# EAGLE board OSO-PYCO-A1-02 (EAGLE 9.6.2)
REV: A
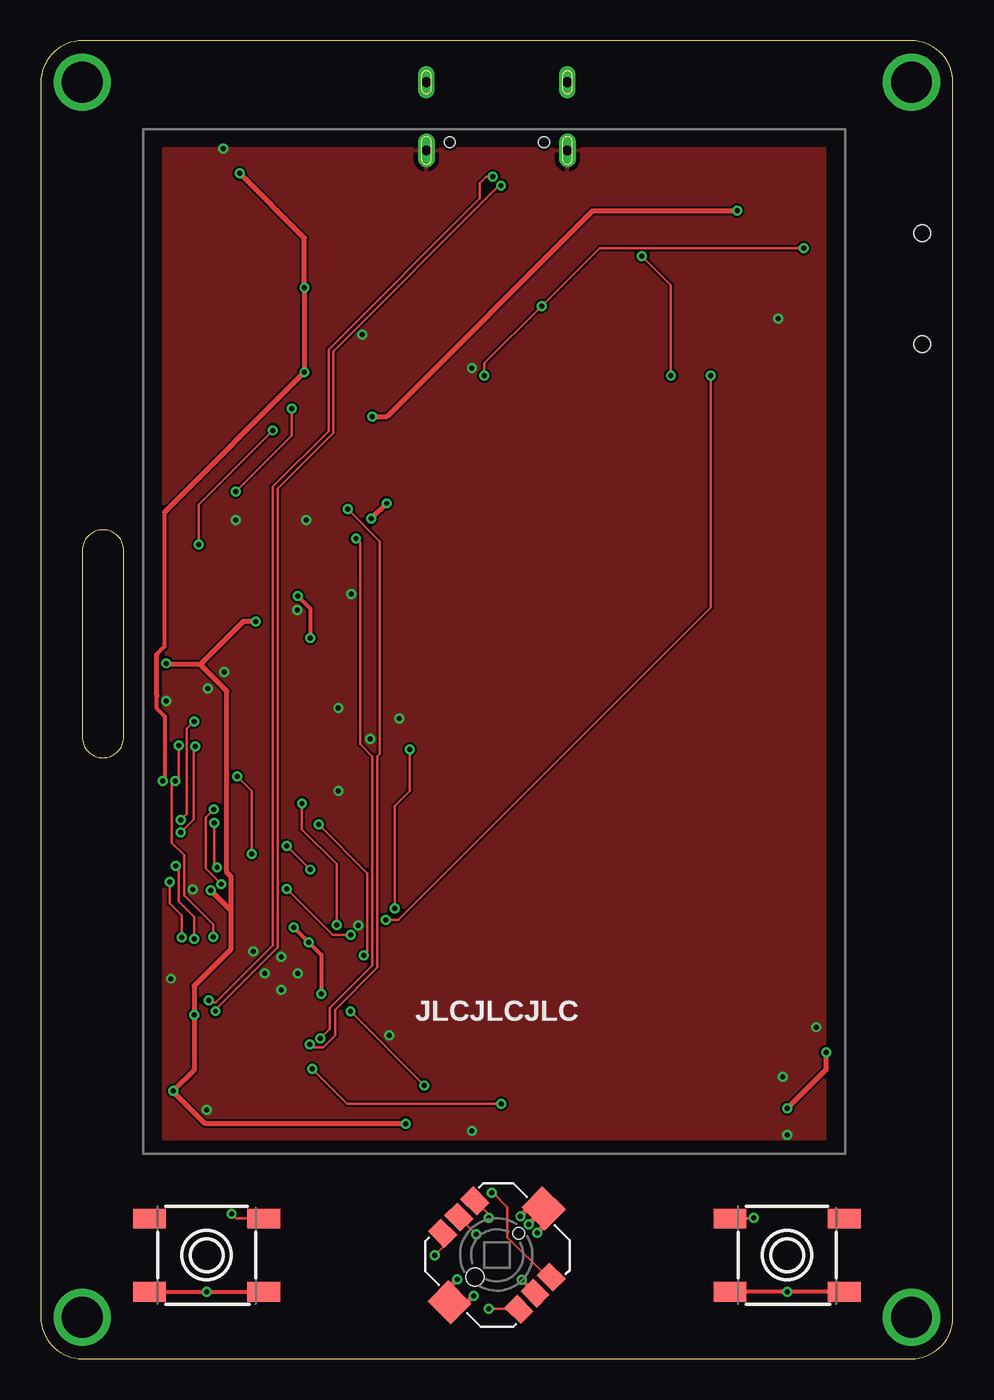
[diagram p0: board, top side]
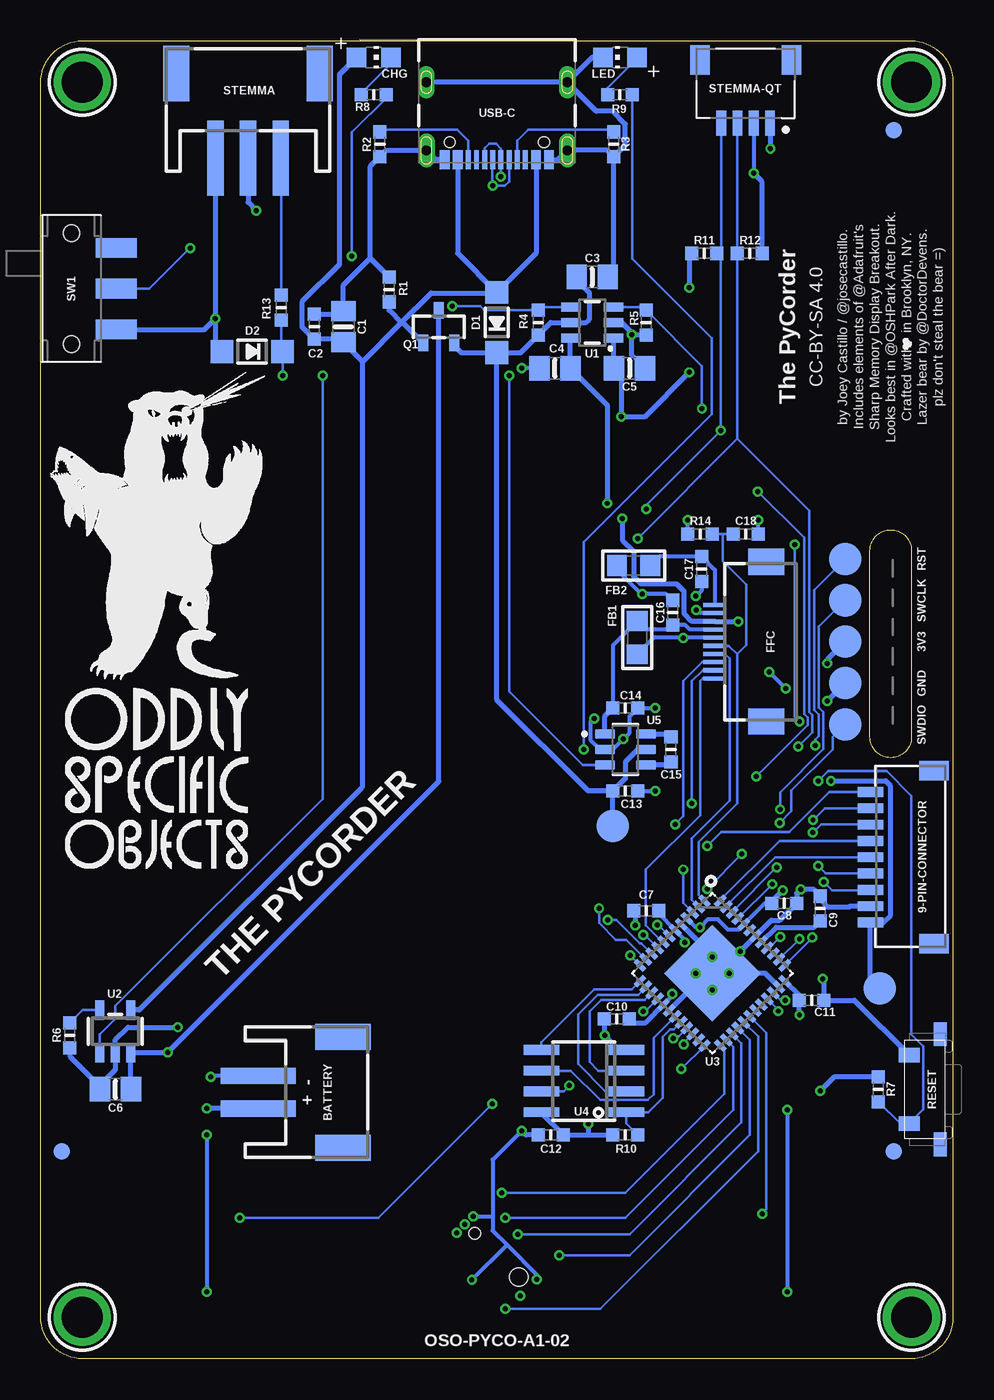
[diagram p1: board, bottom side, seen from below]

Size 55.88 x 80.77 mm. Coordinates in mm from the lower left corner, seen from the top.
Outline: 2.54,0 53.34,0 arc90 55.88,2.54 55.88,78.23 arc90 53.34,80.77 2.54,80.77 arc90 0,78.23 0,2.54 arc90 2.54,0
Outline: 5.08,49.53 arc90 3.81,50.8 arc90 2.54,49.53 2.54,38.1 arc90 3.81,36.83 arc90 5.08,38.1 5.08,49.53
Copper layers (1*16): Top 0.035559375mm / dielectric 1.6mm / Bottom 0.035559375mm
Design rules "jlcpcb2layer *": minimum track width 5mil, minimum drill 12mil, track to track 5mil, track to pad 5mil, pad to pad 5mil, via to via 5mil, smd to smd 5mil, copper to edge 8mil, drill to drill 6mil, minimum pad ring 6mil, minimum via ring 6mil, stop-mask expansion 2.5mil, vias tented up to drill 12mil, thermal gap 10mil
Net classes: 1 power: width 0.254 mm, drill 0.254 mm; 2 gnd: width 0.254 mm, drill 0.254 mm
bKeepout: area 24,22.5 to 54.5,59.5; area 26.2,25.3 to 51.2,57.8; area 26.6,23.6 to 50.6,58.6; area 28.1,22.9 to 48.1,58.9; area 29.9,33.7 to 55.3,60.4; area 24,22 to 54.5,33.4

## Footprints (pad centres in the part's own frame; a part is rotated, then mirrored left to right if it is on the bottom)
JST_SH9 = smd 0.6 x 1.55: 1 -4,2.514; 2 -3,2.514; 3 -2,2.514; 4 -1,2.514; 5 0,2.514; 6 1,2.514; 7 2,2.514; 8 3,2.514; 9 4,2.514 | smd 1.2 x 1.8: MT1 -5.3,-1.386; MT2 5.3,-1.386
6MMX6MM_TACTILE_SMT = smd 2 x 1.2: A -3.5,-2.25; A' 3.5,-2.25; B -3.5,2.25; B' 3.5,2.25
K1-5202UA = smd 1.4 x 1.1: P$1 -3.3,1.4; P$2 -3.3,0; P$3 -3.3,-1.4; P$4 3.3,1.4; P$5 3.3,0; P$6 3.3,-1.4 | smd 2 x 1.8: P$7 0,-4.1; P$8 0,4.05 | hole 1.1: 0,-1.9 | hole 0.7: 0,1.9
JSTPH2 = smd 1 x 4.6: 1 -1,-3.7; 2 1,-3.7 | smd 1.6 x 3.4: NC1 -3.4,1.5; NC2 3.4,1.5
0805-NO = smd 1.24 x 1.5: 1 -0.95,0; 2 0.95,0
_0603MP = smd 0.8 x 0.8: 1 -0.762,0; 2 0.762,0
CHIP-LED0805 = smd 1.2 x 1.2: A 0,-1.05; C 0,1.05
SOD-123 = smd 1.4 x 1.4: A 1.85,0; C -1.85,0
_0805 = smd 1.2 x 1.3: 1 -1.016,0; 2 1.016,0
SHARP_2.7IN = smd 0.25 x 1.4: P$1 -2.25,2.9; P$2 -1.75,2.9; P$3 -1.25,2.9; P$4 -0.75,2.9; P$5 -0.25,2.9; P$6 0.25,2.9; P$7 0.75,2.9; P$8 1.25,2.9; P$9 1.75,2.9; P$10 2.25,2.9 | smd 1.6 x 2.2: SUPPORT1 -4.9,-0.25; SUPPORT2 4.9,-0.25
FIDUCIAL_1MM = smd 1 x 1: 1 0,0
SOT23-R = smd 0.635 x 1.016: 1 -0.95,-1; 2 0.95,-1; 3 0,1
TL3330A = smd 0.9 x 1.27: P$1 -2.1,0.89; P$2 2.1,0.89 | smd 1.45 x 0.8: P$3 -3.375,-1; P$4 3.375,-1
JSTPH3 = smd 1 x 4.6: 1 -2,-2.7; 2 0,-2.7; 3 2,-2.7 | smd 1.6 x 3.4: NC1 -4.4,2.5; NC2 4.4,2.5
JST_SM04B-SRSS-TB(LF)(SN) = smd 0.6 x 1.55: 1 -1.5,0; 2 -0.5,0; 3 0.5,0; 4 1.5,0 | smd 1.2 x 1.8: S1 -2.8,-3.875; S2 2.8,-3.875
SW_JS102011SAQN = smd 1.2 x 2.5: 1 -2.5,2.75; 2 0,2.75; 3 2.5,2.75 | hole 1: -3.4,0; 3.4,0
TESTPOINT_ROUND_2MM_NO = smd 2 x 2: P$1 0,0
SOT23-6 = smd 0.55 x 1.2: 1 0.95,1.3; 2 0,1.3; 3 -0.95,1.3; 4 -0.95,-1.3; 5 0,-1.3; 6 0.95,-1.3
SOT23-5 = smd 0.55 x 1.2: 1 -0.95,-1.3; 2 0,-1.3; 3 0.95,-1.3; 4 0.95,1.3; 5 -0.95,1.3
QFN48_7X7MC = smd 0.813 x 0.305: 1 -3.48,2.794; 2 -3.48,2.286; 3 -3.48,1.778; 4 -3.48,1.27; 5 -3.48,0.762; 6 -3.48,0.254; 7 -3.48,-0.254; 8 -3.48,-0.762; 9 -3.48,-1.27; 10 -3.48,-1.778; 11 -3.48,-2.286; 12 -3.48,-2.794; 25 3.48,-2.794; 26 3.48,-2.286; 27 3.48,-1.778; 28 3.48,-1.27; 29 3.48,-0.762; 30 3.48,-0.254; 31 3.48,0.254; 32 3.48,0.762; 33 3.48,1.27; 34 3.48,1.778; 35 3.48,2.286; 36 3.48,2.794 | smd 0.305 x 0.813: 13 -2.794,-3.48; 14 -2.286,-3.48; 15 -1.778,-3.48; 16 -1.27,-3.48; 17 -0.762,-3.48; 18 -0.254,-3.48; 19 0.254,-3.48; 20 0.762,-3.48; 21 1.27,-3.48; 22 1.778,-3.48; 23 2.286,-3.48; 24 2.794,-3.48; 37 2.794,3.48; 38 2.286,3.48; 39 1.778,3.48; 40 1.27,3.48; 41 0.762,3.48; 42 0.254,3.48; 43 -0.254,3.48; 44 -0.762,3.48; 45 -1.27,3.48; 46 -1.778,3.48; 47 -2.286,3.48; 48 -2.794,3.48 | smd 4.191 x 4.191: 49 0,0
SOIC8_150MIL = smd 0.6 x 2.2: 1 -1.905,-2.6; 2 -0.635,-2.6; 3 0.635,-2.6; 4 1.905,-2.6; 5 1.905,2.6; 6 0.635,2.6; 7 -0.635,2.6; 8 -1.905,2.6
SOT95P280X145-6N = smd 1.21 x 0.58: 1 -1.255,0.95; 2 -1.255,0; 3 -1.255,-0.95; 4 1.255,-0.95; 5 1.255,0; 6 1.255,0.95
MOUNTINGHOLE_2.5_PLATED = drill 2.5 pad 3.2: P$1 0,0
GCT_USB4105-GF-A = smd 0.6 x 1.15: A1/B12 -3.2,4.755; A4/B9 -2.4,4.755; B1/A12 3.2,4.755; B4/A9 2.4,4.755 | smd 0.3 x 1.15: A5 -1.25,4.755; A6 -0.25,4.755; A7 0.25,4.755; A8 1.25,4.755; B5 1.75,4.755; B6 0.75,4.755; B7 -0.75,4.755; B8 -1.75,4.755 | drill 0.6 pad 1 long: G1 -4.32,0; G2 4.32,0 | drill 0.6 pad 1.05 long: G3 -4.32,4.18; G4 4.32,4.18 | hole 0.65: 2.89,3.68; -2.89,3.68

## Placement (x,y rotation side)
9-PIN-CONNECTOR  [JST_SH9]  2.54,30.73 90 bottom
B1  EVQQ  [6MMX6MM_TACTILE_SMT]  10.16,6.35 0 top
B2  EVQQ  [6MMX6MM_TACTILE_SMT]  45.72,6.35 0 top
B3  K1-5202UA  [K1-5202UA]  27.94,6.35 315 top
BATTERY  JSTPH  [JSTPH2]  38.86,16.33 270 bottom
C1  10uF  [0805-NO]  37.34,63.25 90 bottom
C2  0.1uF  [_0603MP]  39.12,63.25 90 bottom
C3  10uF  [0805-NO]  22.1,66.29 0 bottom
C4  10uF  [0805-NO]  24.38,60.71 180 bottom
C5  10uF  [0805-NO]  19.81,60.71 0 bottom
C6  10uF  [0805-NO]  51.31,16.51 180 bottom
C7  1uF  [_0603MP]  18.8,27.46 0 bottom
C8  1uF  [_0603MP]  10.34,27.91 180 bottom
C9  1uF  [_0603MP]  8.13,27.58 270 bottom
C10  1uF  [_0603MP]  20.6,20.83 0 bottom
C11  1uF  [_0603MP]  8.66,21.97 180 bottom
C12  1uF  [_0603MP]  24.64,13.72 0 bottom
C13  2.2uF  [_0603MP]  20.07,34.8 0 bottom
C14  2.2uF  [_0603MP]  20.07,39.88 0 bottom
C15  .22uF  [_0603MP]  17.27,37.34 270 bottom
C16  1uF  [_0603MP]  17.17,45.72 90 bottom
C17  1uF  [_0603MP]  15.4,48.39 90 bottom
C18  0.1uF  [_0603MP]  12.7,50.55 0 bottom
CHG  AMBER  [CHIP-LED0805]  35.48,79.76 270 bottom
D1  MBR120  [SOD-123]  27.94,63.5 90 bottom
D2  3.6V  [SOD-123]  42.93,61.72 180 bottom
FB1  FERRITE  [_0805]  19.33,44.2 270 bottom
FB2  FERRITE  [_0805]  19.56,48.61 0 bottom
FFC  LS027B7DH01  [SHARP_2.7IN]  11.68,43.94 90 bottom
FID1  FIDUCIAL_1MM  [FIDUCIAL_1MM]  3.63,12.7 0 bottom
FID2  FIDUCIAL_1MM  [FIDUCIAL_1MM]  54.61,12.7 0 bottom
FID3  FIDUCIAL_1MM  [FIDUCIAL_1MM]  3.63,75.29 0 bottom
LED  RED  [CHIP-LED0805]  20.4,79.76 90 bottom
Q1  DMG341  [SOT23-R]  31.5,63.25 0 bottom
R1  100K  [_0603MP]  34.54,65.53 90 bottom
R2  5.1K  [_0603MP]  35.1,74.42 270 bottom
R3  5.1K  [_0603MP]  20.78,74.42 270 bottom
R4  100K  [_0603MP]  25.4,63.5 90 bottom
R5  100K  [_0603MP]  18.8,63.5 270 bottom
R6  10K  [_0603MP]  54.1,19.81 270 bottom
R7  10K  [_0603MP]  4.57,16.51 270 bottom
R8  1K  [_0603MP]  35.48,77.47 0 bottom
R9  1K  [_0603MP]  20.4,77.47 180 bottom
R10  10K  [_0603MP]  20.07,13.72 180 bottom
R11  10K  [_0603MP]  15.24,67.74 180 bottom
R12  10K  [_0603MP]  12.45,67.74 0 bottom
R13  1K  [_0603MP]  41.15,64.41 270 bottom
R14  10K  [_0603MP]  15.49,50.55 180 bottom
RESET  [TL3330A]  1.78,16.51 90 bottom
STEMMA  JST PH 3  [JSTPH3]  43.18,76.28 0 bottom
STEMMA-QT  SM04B-SRSS-TB(LF)(SN)  [JST_SM04B-SRSS-TB(LF)(SN)]  12.7,75.72 180 bottom
SW1  JS102011SAQN  [SW_JS102011SAQN]  54,65.58 270 bottom
TP1  [TESTPOINT_ROUND_2MM_NO]  6.6,41.4 90 bottom
TP2  [TESTPOINT_ROUND_2MM_NO]  6.6,43.94 90 bottom
TP3  [TESTPOINT_ROUND_2MM_NO]  6.6,46.48 90 bottom
TP4  [TESTPOINT_ROUND_2MM_NO]  20.83,32.66 0 bottom
TP5  [TESTPOINT_ROUND_2MM_NO]  4.47,22.71 0 bottom
TP6  [TESTPOINT_ROUND_2MM_NO]  6.6,38.86 90 bottom
TP8  [TESTPOINT_ROUND_2MM_NO]  6.6,49.02 90 bottom
U1  AP7332-3333W6-7SOT23  [SOT23-6]  22.1,63.5 270 bottom
U2  MCP73831T-2ACI/OT  [SOT23-5]  51.31,20.07 0 bottom
U3  ATSAMD51G18A-MUT  [QFN48_7X7MC]  14.73,23.62 315 bottom
U4  2MB Flash  [SOIC8_150MIL]  22.61,17.02 90 bottom
U5  REG710NA-5/3K  [SOT95P280X145-6N]  20.07,37.34 0 bottom
U$9  MOUNTINGHOLE2.5  [MOUNTINGHOLE_2.5_PLATED]  2.54,78.23 180 bottom
U$10  MOUNTINGHOLE2.5  [MOUNTINGHOLE_2.5_PLATED]  53.34,78.23 180 bottom
U$16  [OSO_WORDMARK_THREELINE_450MIL_1000DPI]  48.77,35.56 0 bottom
U$27  MOUNTINGHOLE2.5  [MOUNTINGHOLE_2.5_PLATED]  53.34,2.54 90 bottom
U$28  MOUNTINGHOLE2.5  [MOUNTINGHOLE_2.5_PLATED]  2.54,2.54 270 bottom
U$67  [OSO_BEAR_525X750MIL_1000DPI]  48.77,51.05 0 bottom
USB-C  USB4105-GF-A  [GCT_USB4105-GF-A]  27.94,78.23 180 bottom

## Library data of the parts
9-PIN-CONNECTOR B1 B2 BATTERY C1 C2 C6-C12 C16-C18 D1 D2 FB1 FB2 Q1 R1-R14 STEMMA TP1-TP6 TP8 U2 U4 = microbuilder
B3 = K1-5202UA
C3 C5 = microbuilder; CHECKED: KTOWN; COMPANY: ADAFRUIT INDUSTRIES; DRAWN: KTOWN; REV: A
C4 C13-C15 = microbuilder; REV: A
CHG LED = adafruit
FFC = adafruit_display
FID1 FID2 = microbuilder; BOM: EXCLUDE
FID3 U$27 U$28 = microbuilder; BOM: EXCLUDE; CHECKED: KTOWN; COMPANY: ADAFRUIT INDUSTRIES; DRAWN: KTOWN; REV: A
RESET = oddlyspecific
STEMMA-QT = SM04B-SRSS-TB_LF__SN_; DESCRIPTION: SH Series 1.0 mm Pitch 2 Position Single Row Side Entry Shrouded Header; DIGI-KEY_PART_NUMBER: 455-1804-1-ND; DIGI-KEY_PURCHASE_URL: https://www.digikey.com/product-detail/en/jst-sales-america-inc/SM04B-SRSS-TB_LF__SN_/455-1804-1-ND/926875?utm_source=snapeda&utm_medium=aggregator&utm_campaign=symbol; MF: JST Sales; MP: SM04B-SRSS-TB_LF__SN_; PACKAGE: None
SW1 = JS102011SAQN; DESCRIPTION: Slide Switch SPDT Surface Mount, Right Angle; DIGI-KEY_PART_NUMBER: 401-1999-1-ND; DIGI-KEY_PURCHASE_URL: https://www.digikey.com/product-detail/en/c-k/JS102011SAQN/401-1999-1-ND/1640114?utm_source=snapeda&utm_medium=aggregator&utm_campaign=symbol; MF: C&K; MP: JS102011SAQN; PACKAGE: None
U1 U$16 U$67 = My Stuff
U3 = ATSAMD51G18AMUT; BUILT_BY: EMA_Molly; COPYRIGHT: Copyright (C) 2018 Accelerated Designs. All rights reserved; MANUFACTURER_PART_NUMBER: ATSAMD51G18A-MUT; VENDOR: Microchip
U5 = REG710NA-5_3K; DESCRIPTION: 30-mA Switched-Cap DC-DC Converter with fixed 5-V Output 6-SOT-23 -40 to 85; DIGI-KEY_PART_NUMBER: 296-26327-1-ND; MF: Texas Instruments; MP: REG710NA-5/3K; PACKAGE: SOT-23-6 Texas Instruments; PURCHASE-URL: https://pricing.snapeda.com/search/part/REG710NA-5/3K/?ref=eda
U$9 U$10 = microbuilder; BOM: EXCLUDE; REV: A
USB-C = USB4105-GF-A; DESCRIPTION: USB-C (USB TYPE-C) USB 2.0 Receptacle Connector 24 (16+8 Dummy) Position Surface Mount, Right Angle; Through Hole; MF: GCT; MP: USB4105-GF-A; PACKAGE: None; PURCHASE-URL: https://pricing.snapeda.com/search/part/USB4105-GF-A/?ref=eda

## Nets
3.3V [power]: C4.1 C7.2 C8.2 C10.2 C11.2 C12.2 FFC.P$8 R7.1 R10.2 TP2.P$1 U1.6 U3.4 U3.6 U3.17 U3.36 U3.44 U4.8
5.0V [power]: C14.1 C16.1 FB1.1 FFC.P$7 U5.1
!RESET: R7.2 RESET.P$1 TP8.P$1 U3.40
+3V3 [power]: 9-PIN-CONNECTOR.1 C5.1 R11.2 R12.2 STEMMA-QT.2 STEMMA.2 TP5.P$1 U1.1
A0: 9-PIN-CONNECTOR.9 U3.3
A1/SCK: 9-PIN-CONNECTOR.6 U3.48
A2/MOSI: 9-PIN-CONNECTOR.5 U3.47
AGND [gnd]: C17.2 FB2.2 FFC.P$10
AVDD [power]: C17.1 FB1.2 FFC.P$6
CC1: R3.1 USB-C.A5
CC2: R2.1 USB-C.B5
CENTER: B3.P$2 U3.27
D0/CS: 9-PIN-CONNECTOR.4 U3.38
D1/MISO: 9-PIN-CONNECTOR.3 U3.37
DISP: C18.1 FFC.P$5 R14.1 U3.1
DISPLAY_CS: FFC.P$3 U3.12
DISPLAY_MOSI: FFC.P$2 U3.7
DISPLAY_SCK: FFC.P$1 U3.8
EN: R4.2 SW1.2 U1.4 U5.3
EN2: R5.1 U1.3 U3.9
EXTCOMIN: FFC.P$4 U3.2
GND [gnd]: 9-PIN-CONNECTOR.2 B1.A B1.A' B2.A B2.A' B3.P$5 B3.P$7 B3.P$8 BATTERY.1 C1.2 C2.2 C3.2 C4.2 C5.2 C6.2 C7.1 C8.1 C9.1 C10.1 C11.1 C12.1 C13.2 C14.2 C16.2 C18.2 D2.A FB2.1 FFC.P$9 LED.C R1.2 R2.2 R3.2 R5.2 R6.2 R14.2 RESET.P$2 STEMMA-QT.1 STEMMA.1 SW1.3 TP1.P$1 U1.2 U2.2 U3.5 U3.18 U3.35 U3.42 U3.49 U4.4 U5.2 USB-C.A1/B12 USB-C.B1/A12 USB-C.G1 USB-C.G2 USB-C.G3 USB-C.G4
LED: R9.1 U3.11
N$1: LED.A R9.2
N$2: CHG.C R8.1
N$4: C15.1 U5.6
N$5: C15.2 U5.4
NE: B3.P$4 U3.25
NEXT: B2.B U3.24
NW: B3.P$1 U3.26
PREV: B1.B' U3.30
PROG: R6.1 U2.5
QSPI_CS: R10.1 U3.20 U4.1
QSPI_DATA[0]: U3.13 U4.5
QSPI_DATA[1]: U3.14 U4.2
QSPI_DATA[2]: U3.15 U4.3
QSPI_DATA[3]: U3.16 U4.7
QSPI_SCK: U3.19 U4.6
SCL: 9-PIN-CONNECTOR.8 R11.1 STEMMA-QT.4 U3.22
SDA: 9-PIN-CONNECTOR.7 R12.1 STEMMA-QT.3 U3.21
SE: B3.P$6 U3.29
STAT: R8.2 U2.1
STEMMA: D2.C R13.2 U3.10
STEMMA_: R13.1 STEMMA.3
SW: B3.P$3 U3.28
SWCLK: TP3.P$1 U3.45
SWDIO: TP6.P$1 U3.46
USB_N: U3.33 USB-C.A7 USB-C.B7
USB_P: U3.34 USB-C.A6 USB-C.B6
V+ [power]: C3.1 C13.1 D1.C Q1.2 R4.1 TP4.P$1 U1.5 U5.5
VBAT [power]: BATTERY.2 C6.1 Q1.3 U2.3
VBUS [power]: C1.1 C2.1 CHG.A D1.A Q1.1 R1.1 U2.4 USB-C.A4/B9 USB-C.B4/A9
VDDCORE1: C9.2 U3.41
VSW: U3.43

## Tracks (layer width: path | path; a pad name or v marks a point on that pad's centre or on a via)
3.3V  (via drill 0.3)
  Top 0.254: v17.19,22.37 17.19,24.76 v16.43,25.52 v16.42,25.52 v15.49,26.44
  Top 0.305: v22.35,14.41 10.08,14.41 8.13,16.36 v8.13,16.41 9.4,17.68 v9.4,21.08 9.4,22.86 11.66,25.12 11.66,27.46 11.65,27.46 | v10.41,28.7 11.65,27.46 | 9.77,42.55 11.41,40.92 11.41,29.81 11.65,29.57 11.65,27.46 | v13.16,45.19 12.41,45.19 9.77,42.55 | 9.77,42.55 7.76,42.55 v7.7,42.62 | v21.18,52.42 v20.25,51.49
  Bottom 0.254: C7.2 18.03,27.28 U3.6 16.43,25.67 v16.43,25.52 | C8.2 11.52,27.92 U3.44 13.14,26.29 13.77,26.29 14.4,26.92 15.01,26.92 v15.49,26.44 15.76,26.44 U3.4 | 20.23,51.47 v20.25,51.49 | C10.2 19.58,20.57 19.56,20.57 | U3.17 17.19,22.25 v17.19,22.37
  Bottom 0.305: U3.36 9.42,22.27 C11.2 9.42,21.11 v9.4,21.08 | 19.56,20.57 18.86,20.57 U3.17 | U4.8 25.21,15.05 C12.2 22.35,13.72 | 22.35,13.72 R10.2 | C8.2 11.1,28.02 v10.41,28.7 | v22.35,14.41 22.35,13.72 | TP2.P$1 7.7,42.85 v7.7,42.62 | U1.6 23.43,62.51 C4.1 21.18,58.45 v21.18,52.42 | 20.23,51.47 20.23,50.12 19.57,49.47 19.57,47.94 19.12,47.5 16.96,47.5 16.47,47.01 16.47,45.68 15.99,45.19 FFC.P$8 v13.16,45.19 | v8.13,16.41 7.27,17.27 R7.1
5.0V
  Bottom 0.254: C14.1 20.83,43.72 FB1.1 18.81,44.69 17.02,44.69 17.17,44.85 C16.1 16.39,44.96 16.13,44.69 FFC.P$7
  Bottom 0.305: U5.1 21.32,39.39 C14.1
!RESET  (via drill 0.3)
  Top 0.152: v10.57,25.86 10.57,26.62 8.79,28.4 8.79,30.86 8.04,31.61 8.04,35.22 v8.24,35.42 8.44,35.62 v8.44,37.59
  Bottom 0.152: R7.2 3.23,14.41 RESET.P$1 1.8,15.27 1.8,19.16 2.54,19.89 2.54,34.5 4.06,36.03 7.64,36.03 v8.24,35.42 | U3.40 11.24,25.19 v10.57,25.86 | TP8.P$1 8.51,47.12 8.51,39.77 8.23,39.49 8.23,38.18 8.44,37.96 v8.44,37.59
+3V3  (via drill 0.3)
  Top 0.254: 7.57,51.87 7.57,43.64 7.11,43.18 | v7.47,35.42 7.62,35.57 7.62,39.34 7.11,39.85 7.11,40.64
  Top 0.305: v42.67,70.36 33.82,70.36 21.21,57.75 v20.31,57.75 | 7.11,40.64 7.11,43.18 | v12.19,72.64 16.15,68.68 v16.15,65.63 v16.15,60.45 7.57,51.87
  Bottom 0.254: STEMMA-QT.2 v12.2,72.65 v12.19,72.64 | 20.31,57.91 v20.31,57.75
  Bottom 0.305: STEMMA.2 43.18,70.87 v42.67,70.36 | R12.2 11.68,72.14 v12.2,72.65 | R11.2 16.15,67.59 v16.15,65.63 | v7.47,35.42 4.13,35.42 3.81,35.1 3.81,27.18 4.25,26.73 9-PIN-CONNECTOR.1 5.05,23.29 TP5.P$1 | v20.31,57.75 18.86,57.75 v16.15,60.45 | 20.31,57.91 20.31,60.25 C5.1 20.8,60.74 U1.1
A0  (via drill 0.3)
  Top 0.152: v16.51,29.97 v15.06,31.42
  Bottom 0.152: U3.3 16.52,27.93 16.52,29.96 v16.51,29.97 | 9-PIN-CONNECTOR.9 7.58,34.73 10.03,32.28 14.2,32.28 v15.06,31.42
A1/SCK
  Bottom 0.152: 9-PIN-CONNECTOR.6 10.62,31.73 14.25,28.11 U3.48
A2/MOSI
  Bottom 0.152: U3.47 13.89,27.74 10.9,30.73 9-PIN-CONNECTOR.5
AGND
  Bottom 0.254: FFC.P$10 14.58,48.34 C17.2 18.01,49.15 FB2.2
AVDD  (via drill 0.3)
  Top 0.254: v15.75,46.74 16.51,45.97 v16.51,44.16
  Bottom 0.254: FFC.P$6 16.51,44.19 | 16.51,44.19 18.32,44.19 FB1.2 | C17.1 15.4,47.09 v15.75,46.74 | v16.51,44.16 16.51,44.19
CC1
  Bottom 0.152: R3.1 20.92,75.33 26.01,75.33 26.69,74.66 USB-C.A5
CC2
  Bottom 0.152: R2.1 34.95,75.33 30.38,75.33 29.69,74.65 USB-C.B5
CENTER  (via drill 0.3)
  Top 0.152: B3.P$2 v26.67,7.62 | v26.67,7.62
  Bottom 0.152: v26.67,7.62 19.81,7.62 12.95,14.48 12.95,19.33 U3.27
D0/CS  (via drill 0.3)
  Top 0.152: v8.26,30.2 8.46,30 8.46,28.02 9.4,27.08 v9.4,25.73
  Bottom 0.152: 9-PIN-CONNECTOR.4 7.79,29.73 v8.26,30.2 | U3.38 v9.4,25.72 v9.4,25.73
D1/MISO  (via drill 0.3)
  Top 0.152: v8.62,25.83 8.62,27.18 7.91,27.89 v7.91,29.21
  Bottom 0.152: U3.37 8.62,25.78 v8.62,25.83 | v7.91,29.21 7.39,28.7 5.59,28.7 5.56,28.73 9-PIN-CONNECTOR.3
DISP
  Bottom 0.152: C18.1 14.1,50.55 | 14.1,50.55 R14.1 | U3.1 15.57,28.41 15.57,31.67 13.21,34.04 13.21,43.18 | FFC.P$5 13.72,43.69 13.21,43.18 | 13.21,43.18 12.65,43.74 12.65,47.45 14.1,48.9 14.1,50.55
DISPLAY_CS  (via drill 0.3)
  Top 0.152: v19.78,24.71 20.01,24.94 20.01,29.75 v17.02,32.74
  Bottom 0.152: FFC.P$3 15.35,42.69 16.51,41.53 16.51,33.25 v17.02,32.74 | U3.12 v19.78,24.71
DISPLAY_MOSI  (via drill 0.3)
  Top 0.152: v18.12,26.58 18.12,30.32 16,32.44 v16,34.04
  Bottom 0.152: U3.7 18.05,26.58 v18.12,26.58 | FFC.P$2 15.34,42.19 16,41.53 v16,34.04
DISPLAY_SCK
  Bottom 0.152: FFC.P$1 15.33,41.69 15.49,41.53 15.49,33.3 18.82,29.97 18.82,26.56 17.8,25.54 U3.8
EN  (via drill 0.3)
  Top 0.152: v46.74,68.07 34.24,68.07 v30.68,64.52 27.18,61.01 v27.18,60.25
  Bottom 0.152: U1.4 25.21,64.45 R4.2 28.7,64.26 28.96,64.52 v30.68,64.52 | SW1.2 49.25,65.58 46.76,68.07 v46.74,68.07 | U5.3 22.67,36.39 27.18,40.89 v27.18,60.25
EN2  (via drill 0.3)
  Top 0.152: v12.04,35.69 12.93,34.8 v12.93,30.94 | v15.37,58.24 15.37,56.59 v11.94,53.16 | v15.06,28.8 17.88,25.98 v18.98,25.98
  Bottom 0.152: U1.3 18.98,64.45 R5.1 15.37,60.84 v15.37,58.24 | U3.9 18.89,25.98 v18.98,25.98 | v15.06,28.8 v12.93,30.94 | v12.04,35.69 8.89,38.84 8.89,39.29 9.12,39.52 9.12,50.33 v11.94,53.16
EXTCOMIN
  Bottom 0.152: U3.2 16,28.13 16,31.88 13.68,34.21 13.68,42.9 13.97,43.19 FFC.P$4
GND  (via drill 0.3)
  Top 0.254: B1.A v10.16,4.1 B1.A' | B2.A' v45.72,4.1 B2.A | B3.P$5 v29.46,4.83
  Top 0.305: B3.P$8 30.8,9.14 v29.9,8.23 | B3.P$8 29.86,9.21 v29.39,8.74 | B3.P$8 30.8,8.12 v30.4,7.72 | v25.5,4.88 25.04,4.42 B3.P$7 26.11,3.45 v26.52,3.86
  Bottom 0.254: FB2.1 20.57,48.34 19.1,46.86 v19.03,46.86 17.55,46.86 C16.2 | C18.2 v11.94,51.41 | FFC.P$9 15.67,45.69 15.72,45.75 v15.72,45.87 | C13.2 v18.24,34.8 | v18.24,39.88 C14.2 19.81,39.37 19.81,38.35 v20.19,37.97 20.83,37.34 U5.2 21.62,37.34 22.21,37.93 22.21,39.01 v21.97,39.24 | C5.2 19.69,61.53 | C4.2 v26.42,60.71 | v45.72,13.72 v45.72,4.1 | BATTERY.1 45.41,17.33 v45.47,17.27 | 28.19,8.74 28.19,12.19 v26.42,13.97 | v10.16,15.24 v10.16,4.1 | R14.2 v16.26,51.41 | v29.39,8.74 28.19,8.74 | 27.32,6.97 25.5,5.16 v25.5,4.88 | 28.19,8.74 28.19,7.85 27.32,6.97 | v29.46,4.83 27.32,6.97 | v11.25,42.09 v10.24,41.07
  Bottom 0.305: U3.35 11.5,23.62 v13.72,23.62 13.72,24.28 v13.03,24.97 U3.42 11.12,26.87 10.62,26.87 C8.1 9.58,28.52 v9.32,28.77 8.53,28.77 8.13,28.37 C9.1 8.13,28.14 7.66,27.66 6.38,27.66 6.31,27.73 9-PIN-CONNECTOR.2 | U3.5 14.73,24.7 v14.73,24.64 U3.49 | v15.75,23.62 15.42,23.29 U3.18 | C12.1 26.16,13.72 v26.42,13.97 | U4.4 20.46,18.92 21.34,19.8 v21.34,19.81 21.36,19.84 C10.1 | C7.1 19.46,27.36 v19.46,26.56 | USB-C.A1/B12 24.2,73.48 USB-C.G3 21.17,74.05 R3.2 | USB-C.B1/A12 31.69,73.48 USB-C.G4 34.71,74.05 R2.2 35.69,73.08 35.69,67.44 | v47.5,20.32 50.55,20.32 51.31,19.56 U2.2 51.31,17.71 52.26,16.76 C6.2 52.26,16.7 54.1,18.54 R6.2 | R5.2 19.69,62.74 v19.69,62.76 | v19.69,62.76 19.69,62.9 20.29,63.5 U1.2 | STEMMA.1 v45.18,63.76 v45.19,63.75 | v45.19,63.75 45.19,62.13 D2.A | C2.2 37.53,64.01 C1.2 37.34,65.79 35.69,67.44 | 19.69,61.53 v19.69,62.76 | STEMMA-QT.1 11.2,74.19 v11.18,74.17 | R1.2 35.69,67.44 | v45.19,63.75 45.86,63.08 SW1.3 | RESET.P$2 6.03,21.97 C11.1 7.9,23.22 v7.98,23.29 | LED.C 22.1,79.76 USB-C.G1 | C3.2 20.78,66.67 R3.2 | TP1.P$1 v7.7,40.31 | USB-C.G1 USB-C.G2 | R3.2 20.07,74.37 20.07,75.67 20.85,76.45 21.84,76.45 USB-C.G1
  other vias: 14.73,22.61
  pour Top: 7.57,74.17 48.01,74.17 48.01,13.46 7.57,13.46
LED  (via drill 0.3)
  Top 0.152: v22.61,37.34 22.61,34.8 21.68,33.87 v21.68,27.6
  Bottom 0.152: R9.1 19.63,67.41 14.78,62.56 14.78,57.89 22.61,50.06 v22.61,37.34 | U3.11 20.02,25.68 20.65,25.68 21.68,26.71 v21.68,27.6
N$1
  Bottom 0.152: LED.A 19.35,79.71 21.16,77.9 R9.2
N$2
  Bottom 0.152: CHG.C 34.43,79.36 36.25,77.55 R8.1
N$4
  Bottom 0.305: U5.6 17.46,38.29 C15.1
N$5
  Bottom 0.305: C15.2 17.46,36.39 U5.4
NE  (via drill 0.3)
  Top 0.152: v27.64,10.16 27.71,10.16 28.59,9.28 28.59,7.45 31.03,5.01 B3.P$4
  Bottom 0.152: v27.64,10.16 20.07,10.16 13.99,16.23 13.99,18.93 U3.25
NEXT  (via drill 0.3)
  Top 0.152: B2.B 43.65,8.6 v43.69,8.64 | v28.22,15.62 18.77,15.62 v16.64,17.76
  Bottom 0.152: v43.69,8.64 35.2,8.64 v28.22,15.62 | v16.64,17.76 U3.24
NW  (via drill 0.3)
  Top 0.152: B3.P$1 27.43,8.84 v27.43,8.64
  Bottom 0.152: v27.43,8.64 20.07,8.64 13.46,15.24 13.46,19.12 U3.26
PREV  (via drill 0.3)
  Top 0.152: B1.B' 11.97,8.6 v11.68,8.89
  Bottom 0.152: U3.30 11.43,19.96 11.43,9.14 v11.68,8.89
PROG
  Bottom 0.152: U2.5 53.31,21.37 R6.1
QSPI_CS
  Bottom 0.152: R10.1 20.01,14.42 U4.1 18.67,15.11 17.78,16 17.78,19.73 17.33,20.18 17.1,20.18 U3.20
QSPI_DATA[0]
  Bottom 0.152: U3.13 19.68,22.63 21.97,22.63 25.21,19.4 U4.5
QSPI_DATA[1]
  Bottom 0.152: U3.14 19.28,22.31 21.76,22.31 22.96,21.11 22.96,18.06 21.29,16.38 U4.2
QSPI_DATA[2]
  Bottom 0.152: U4.3 21.72,17.65 22.25,18.19 22.25,21.29 21.55,21.99 18.88,21.99 U3.15
QSPI_DATA[3]  (via drill 0.3)
  Top 0.152: v23.5,16.74 23.5,16.76 v18.97,21.29
  Bottom 0.152: U4.7 23.85,16.38 v23.5,16.74 | v18.97,21.29 18.96,21.3 18.85,21.3 U3.16
QSPI_SCK
  Bottom 0.152: U4.6 23.42,17.65 21.62,15.85 18.69,15.85 18.34,16.21 18.34,19.66 U3.19
SCL  (via drill 0.3)
  Top 0.152: v8.57,33.01 8.95,33.39 8.95,38.62 v9.4,39.07 | v14.22,56.9 9.68,52.35 v9.68,49.9 | v18.8,52.07 20.78,50.09 20.78,37.06 20.62,36.91 20.62,23.98 18.03,21.39 18.03,19.82 17.3,19.08 16.65,19.08 v16.48,19.25
  Bottom 0.152: 9-PIN-CONNECTOR.8 7.85,33.73 v8.57,33.01 | v16.48,19.25 16.46,19.28 16.46,19.38 U3.22 | STEMMA-QT.4 14.2,68.05 R11.1 14.22,67.49 v14.22,56.9 18.8,52.32 v18.8,52.07 | v9.4,39.07 9.68,39.35 v9.68,49.9
SDA  (via drill 0.3)
  Top 0.152: v9.47,37.52 9.37,37.41 9.37,33.05 v8.57,32.25 | v17.13,19.64 17.71,20.23 17.71,21.5 20.31,24.1 20.31,36.92 19.56,37.67 19.56,50.02 v19.31,50.27
  Bottom 0.152: 9-PIN-CONNECTOR.7 8.07,32.73 8.55,32.25 v8.57,32.25 | U3.21 16.8,19.76 17.02,19.76 v17.13,19.64 | STEMMA-QT.3 R12.1 | R12.1 | R12.1 13.2,56.9 13.2,56.38 | v9.47,37.52 8.61,38.38 8.61,39.44 8.81,39.65 8.81,51.99 13.2,56.38 | v19.31,50.27 13.2,56.38
SE  (via drill 0.3)
  Top 0.152: v27.43,3.05 29.26,3.05 B3.P$6
  Bottom 0.152: v27.43,3.05 21.59,3.05 11.94,12.7 11.94,19.75 U3.29
STAT  (via drill 0.3)
  Top 0.152: v36.83,67.56 38.61,65.79 v38.61,60.25
  Bottom 0.152: U2.1 52.26,19.88 51.31,20.83 51.31,21.62 38.61,34.32 v38.61,60.25 | R8.2 34.66,77.41 34.66,77.32 36.83,75.16 v36.83,67.56
STEMMA  (via drill 0.3)
  Top 0.152: v21.13,26.9 21.9,26.9 41.05,46.05 v41.05,60.25
  Bottom 0.152: R13.2 41.15,61.79 D2.C 41.05,61.72 v41.05,60.25 | U3.10 19.09,25.46 19.19,25.46 20.62,26.9 v21.13,26.9
STEMMA_
  Bottom 0.152: R13.1 41.15,73.54 STEMMA.3
SW  (via drill 0.3)
  Top 0.152: v24.13,6.35 24.62,6.84 B3.P$3
  Bottom 0.152: v24.13,6.35 19.81,6.35 12.45,13.72 12.45,19.54 U3.28
SWCLK  (via drill 0.3)
  Top 0.152: v10.59,33.68 10.59,33.66 10.11,33.17 10.11,30.04 v11.07,29.08
  Bottom 0.152: U3.45 v11.07,29.08 | TP3.P$1 8.2,44.88 8.2,39.9 7.94,39.63 7.94,37.37 10.59,34.71 v10.59,33.68
SWDIO  (via drill 0.3)
  Top 0.152: v10.62,32.84 10.62,30.28 v10.8,30.1
  Bottom 0.152: v10.8,30.1 10.82,30.1 13.53,27.39 U3.46 | v10.62,32.84 9.89,33.57 9.89,34.81 7.37,37.34 7.37,38.1 TP6.P$1
USB_N  (via drill 0.3)
  Top 0.152: v10.7,21.3 10.7,21.38 14.53,25.2 14.53,53.34 17.91,56.72 17.91,61.73 28.06,71.88 v28.19,71.88
  Bottom 0.152: v10.7,21.3 10.7,21.39 U3.33 | USB-C.A7 28.21,73.46 28.21,71.9 v28.19,71.88 27.44,71.88 27.19,72.14 USB-C.B7
USB_P  (via drill 0.3)
  Top 0.152: v10.28,21.96 10.4,21.83 10.73,21.83 14.22,25.32 14.22,53.44 17.63,56.84 17.63,61.84 26.89,71.11 26.89,72.04 27.3,72.45 v27.7,72.45
  Bottom 0.152: v10.28,21.96 10.55,21.96 U3.34 | v27.7,72.45 27.69,72.46 USB-C.A6 27.69,74.17 27.99,74.47 28.4,74.47 28.69,74.18 USB-C.B6
V+
  Bottom 0.305: Q1.2 30.55,62.09 30.11,61.65 D1.C | D1.C 26.49,61.65 R4.1 24.64,63.5 U1.5 22.49,63.5 22.29,63.7 22.29,65.35 23.05,66.1 C3.1 | D1.C 27.94,40.39 22.35,34.8 C13.1 | U5.5 19.3,37.34 20.07,36.58 20.07,35.56 C13.1 | TP4.P$1 C13.1
VBAT  (via drill 0.3)
  Top 0.305: v45.72,15.34 48.11,17.73 v48.11,18.77
  Bottom 0.305: BATTERY.2 45.71,15.33 v45.72,15.34 | C6.1 U2.3 v48.11,18.77 31.5,35.38 Q1.3
VBUS
  Bottom 0.305: USB-C.B4/A9 30.34,67.75 D1.A | USB-C.A4/B9 25.54,67.75 D1.A | D1.A 27.98,65.31 31.97,65.31 33.78,63.5 | 33.78,63.5 36.2,61.09 | 36.2,61.09 36.2,35.02 49.85,21.37 U2.4 | CHG.A 37.59,78.7 37.59,67.06 39.88,64.77 39.88,63.25 C2.1 37.53,62.48 C1.1 36.2,61.15 36.2,61.09 | Q1.1 33.7,63.5 33.78,63.5 | R1.1 34.54,64.26 33.78,63.5
VDDCORE1
  Bottom 0.305: U3.41 10.84,26.44 8.51,26.44 C9.2

## Text on the board
tPlace: JLCJLCJLC
bPlace: by Joey Castillo / @josecastillo. / Includes elements of @Adafruit's / Sharp Memory Display Breakout. / Looks best in @OSHPark After Dark. / Crafted with in Brooklyn, NY. / Lazer bear by @DoctorDevens. / plz don't steal the bear =) | CC-BY-SA 4.0 | The PyCorder | RST | SWCLK | 3V3 | GND | SWDIO | THE PYCORDER | + - | OSO-PYCO-A1-02